# EAGLE board 14KEY (EAGLE 9.6.1)
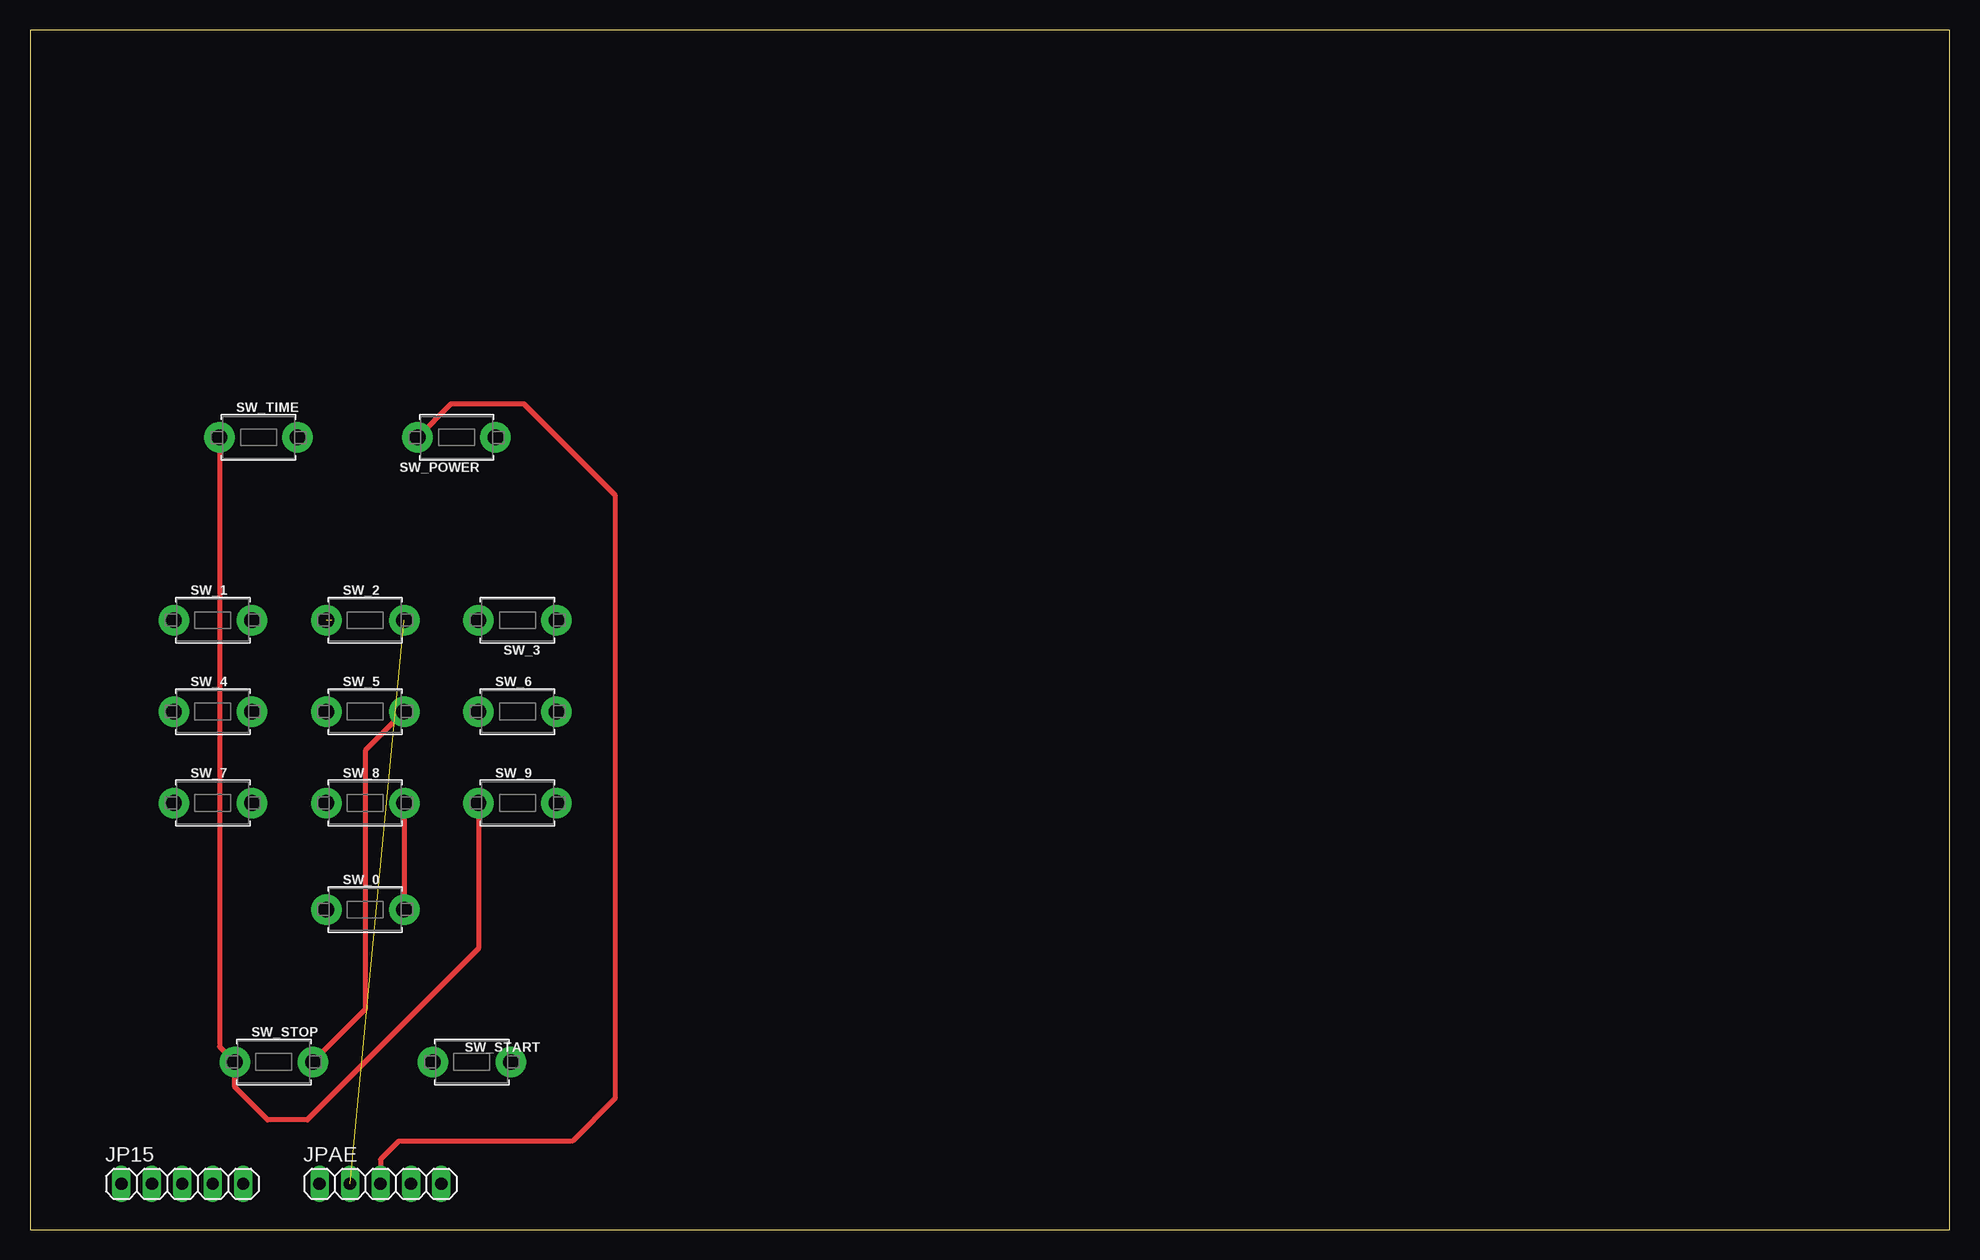
[diagram p0: board, top side]
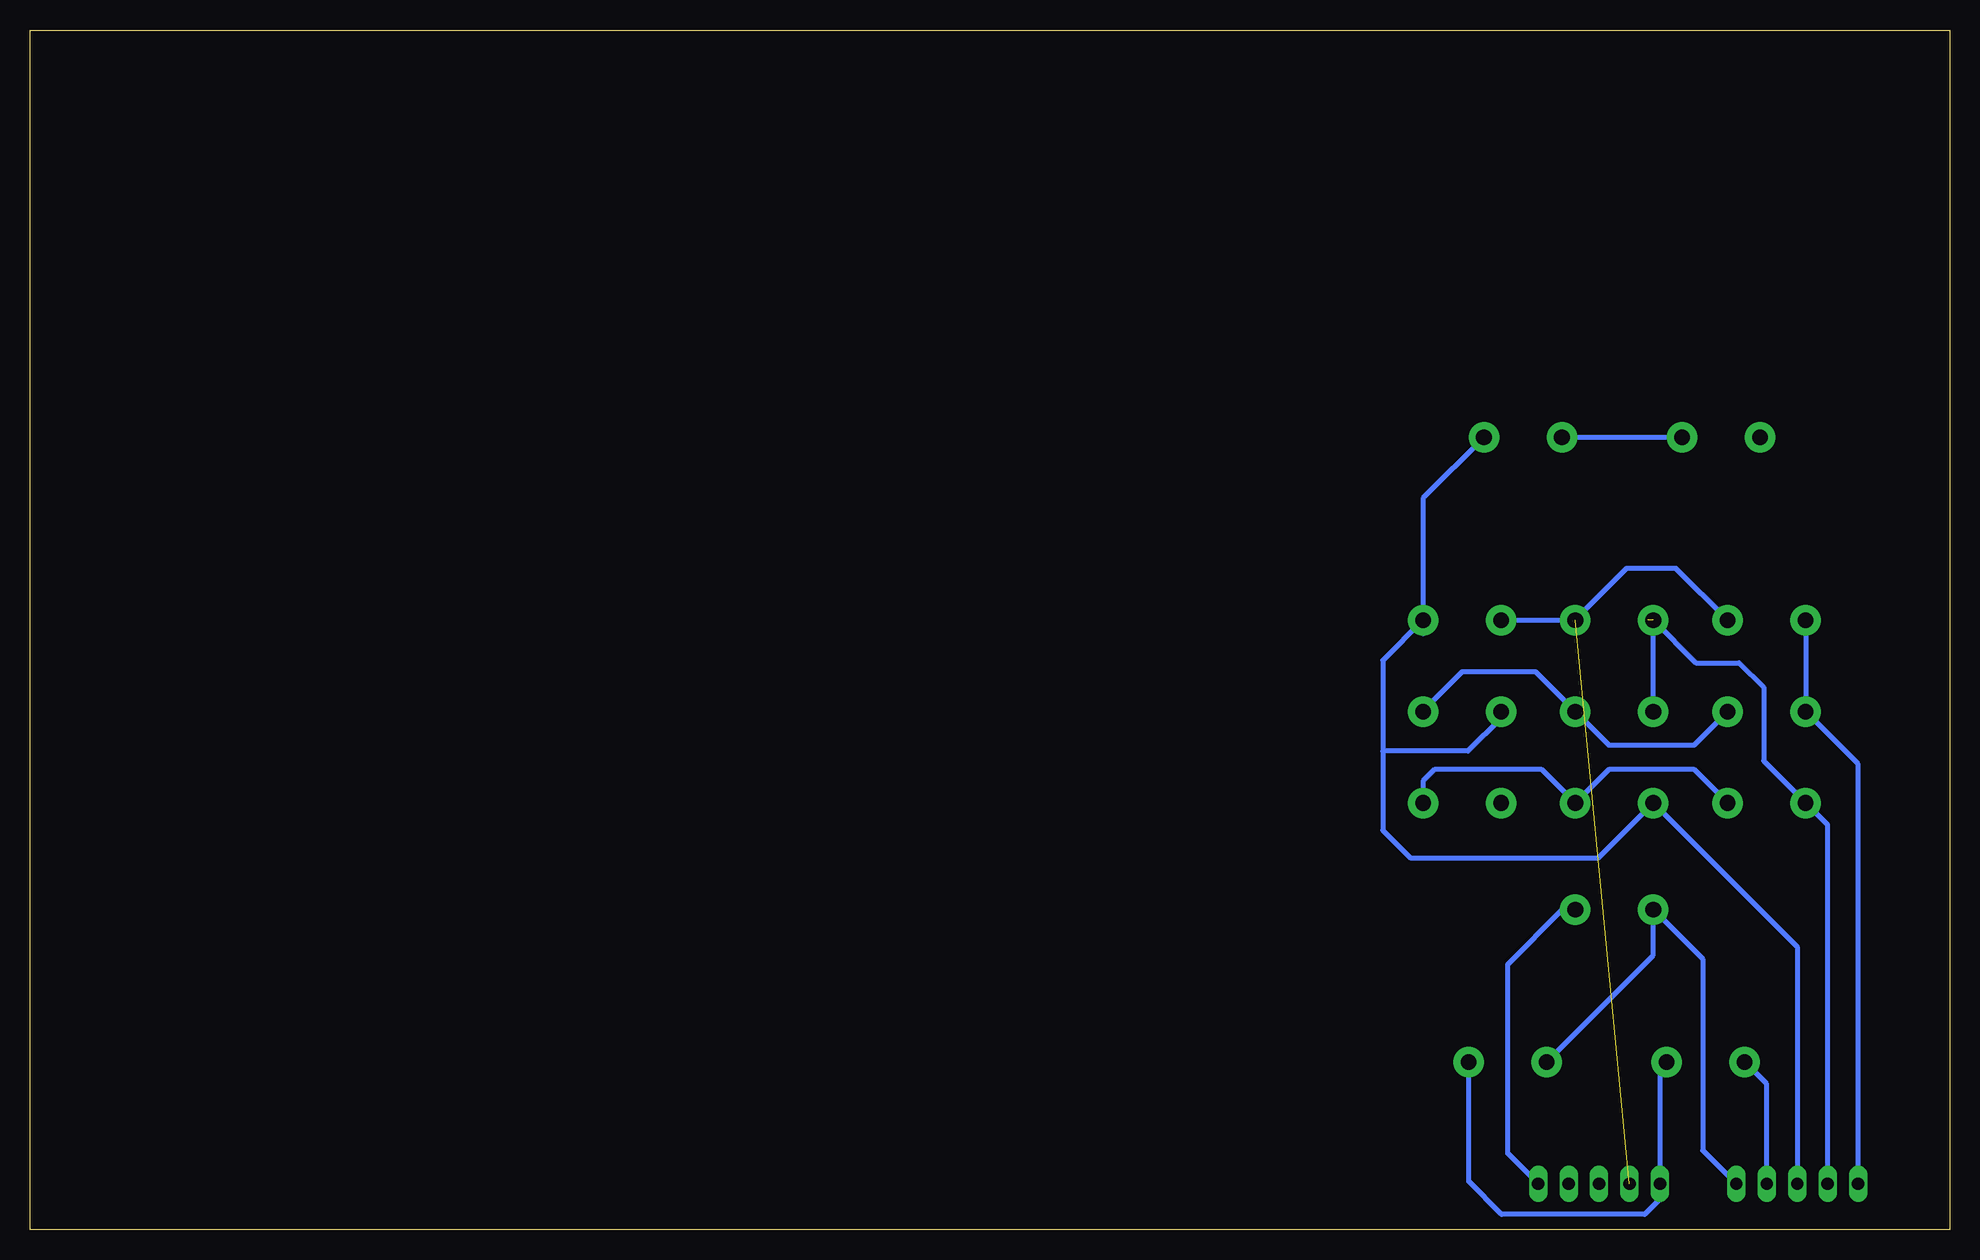
[diagram p1: board, bottom side, seen from below]

Size 160 x 100 mm. Coordinates in mm from the lower left corner, seen from the top.
Outline: 0,0 160,0 160,100 0,100 0,0
Copper layers (1*16): Top 0.035mm / dielectric 1.5mm / Bottom 0.035mm
Design rules "default": minimum track width 6mil, minimum drill 0.35mm, track to track 6mil, track to pad 6mil, pad to pad 6mil, via to via 6mil, smd to smd 6mil, copper to edge 40mil, drill to drill 6mil, minimum pad ring 10mil, minimum via ring 8mil, stop-mask expansion 4mil, vias tented up to drill 0mil, thermal gap 10mil

## Footprints (pad centres in the part's own frame; a part is rotated, then mirrored left to right if it is on the bottom)
1X05 = drill 1.016 long: 1 -5.08,0; 2 -2.54,0; 3 0,0; 4 2.54,0; 5 5.08,0
TACT_PANA-EVQ = drill 1.3 pad 2.54: P$1 -3.25,0; P$2 3.25,0

## Placement (x,y rotation side)
JP15  [1X05]  12.7,3.81 0 top
JPAE  [1X05]  29.21,3.81 0 top
SW_0  [TACT_PANA-EVQ]  27.94,26.67 0 top
SW_1  [TACT_PANA-EVQ]  15.24,50.8 0 top
SW_2  [TACT_PANA-EVQ]  27.94,50.8 0 top
SW_3  [TACT_PANA-EVQ]  40.64,50.8 180 top
SW_4  [TACT_PANA-EVQ]  15.24,43.18 0 top
SW_5  [TACT_PANA-EVQ]  27.94,43.18 0 top
SW_6  [TACT_PANA-EVQ]  40.64,43.18 0 top
SW_7  [TACT_PANA-EVQ]  15.24,35.56 0 top
SW_8  [TACT_PANA-EVQ]  27.94,35.56 0 top
SW_9  [TACT_PANA-EVQ]  40.64,35.56 0 top
SW_POWER  [TACT_PANA-EVQ]  35.56,66.04 180 top
SW_START  [TACT_PANA-EVQ]  36.83,13.97 0 top
SW_STOP  [TACT_PANA-EVQ]  20.32,13.97 0 top
SW_TIME  [TACT_PANA-EVQ]  19.05,66.04 0 top

## Library data of the parts
JP15 JPAE = pinhead
SW_0 SW_1-SW_9 SW_POWER SW_START SW_STOP SW_TIME = adafruit

## Nets
1: JP15.1 SW_1.P$1 SW_4.P$1
2: JP15.2 SW_2.P$1 SW_5.P$1 SW_7.P$1
3: JP15.3 SW_3.P$1 SW_6.P$1 SW_8.P$1 SW_POWER.P$1
4: JP15.4 SW_9.P$1 SW_STOP.P$1 SW_TIME.P$1
5: JP15.5 SW_0.P$1 SW_START.P$1
A: JPAE.1 SW_4.P$2 SW_5.P$2 SW_6.P$2 SW_START.P$2 SW_STOP.P$2
B: JPAE.2 SW_1.P$2 SW_2.P$2 SW_3.P$2
C: JPAE.3 SW_POWER.P$2 SW_TIME.P$2
E: JPAE.5 SW_0.P$2 SW_7.P$2 SW_8.P$2 SW_9.P$2

## Tracks (layer width: path | path; a pad name or v marks a point on that pad's centre or on a via)
1
  Bottom 0.406: JP15.1 7.62,38.81 SW_4.P$1 SW_1.P$1
2  (1 unrouted)
  Bottom 0.406: SW_2.P$1 21.13,47.24 17.53,47.24 15.49,45.21 15.49,39.06 SW_7.P$1 10.16,33.73 JP15.2 | SW_5.P$1 24.69,50.34 25.15,50.8
3
  Bottom 0.406: SW_POWER.P$1 43.89,60.96 SW_3.P$1 | SW_3.P$1 43.89,49.68 | JP15.3 12.7,23.57 SW_8.P$1 29.26,30.99 44.96,30.99 47.24,33.27 47.24,39.88 | SW_3.P$1 47.24,47.45 47.24,39.88 | SW_6.P$1 37.39,42.62 40.13,39.88 47.24,39.88
4
  Top 0.406: SW_TIME.P$1 15.8,15.24 SW_STOP.P$1 17.07,11.89 19.81,9.14 23.11,9.14 37.39,23.42 SW_9.P$1
  Bottom 0.406: JP15.4 15.24,12.14 SW_STOP.P$1
5
  Bottom 0.406: SW_START.P$1 24.69,22.86 SW_0.P$1 20.57,22.55 20.57,6.6 JP15.5
A
  Top 0.406: SW_5.P$2 27.94,39.93 27.94,18.34 SW_STOP.P$2
  Bottom 0.406: SW_STOP.P$2 24.13,13.41 JPAE.1 24.13,2.54 25.4,1.27 37.34,1.27 40.08,4.01 SW_START.P$2 | 31.19,43.74 SW_5.P$2 | SW_5.P$2 34.49,46.48 40.64,46.48 43.89,43.23 SW_6.P$2 | SW_4.P$2 21.28,40.39 28.4,40.39 SW_5.P$2
B  (1 unrouted)
  Bottom 0.406: SW_3.P$2 SW_2.P$2 31.19,50.85 26.92,55.12 22.81,55.12 SW_1.P$2
C
  Top 0.406: SW_POWER.P$2 35.1,68.83 41.15,68.83 48.77,61.21 48.77,10.92 45.21,7.37 30.73,7.37 29.21,5.84 JPAE.3
  Bottom 0.406: SW_TIME.P$2 SW_POWER.P$2
E
  Top 0.406: SW_8.P$2 SW_0.P$2
  Bottom 0.406: SW_7.P$2 21.28,38.35 28.4,38.35 SW_8.P$2 33.98,38.35 42.93,38.35 43.89,37.39 SW_9.P$2 | JPAE.5 36.83,6.35 36.83,22.1 32.26,26.67 SW_0.P$2